# EAGLE board F (EAGLE 9.6.2)
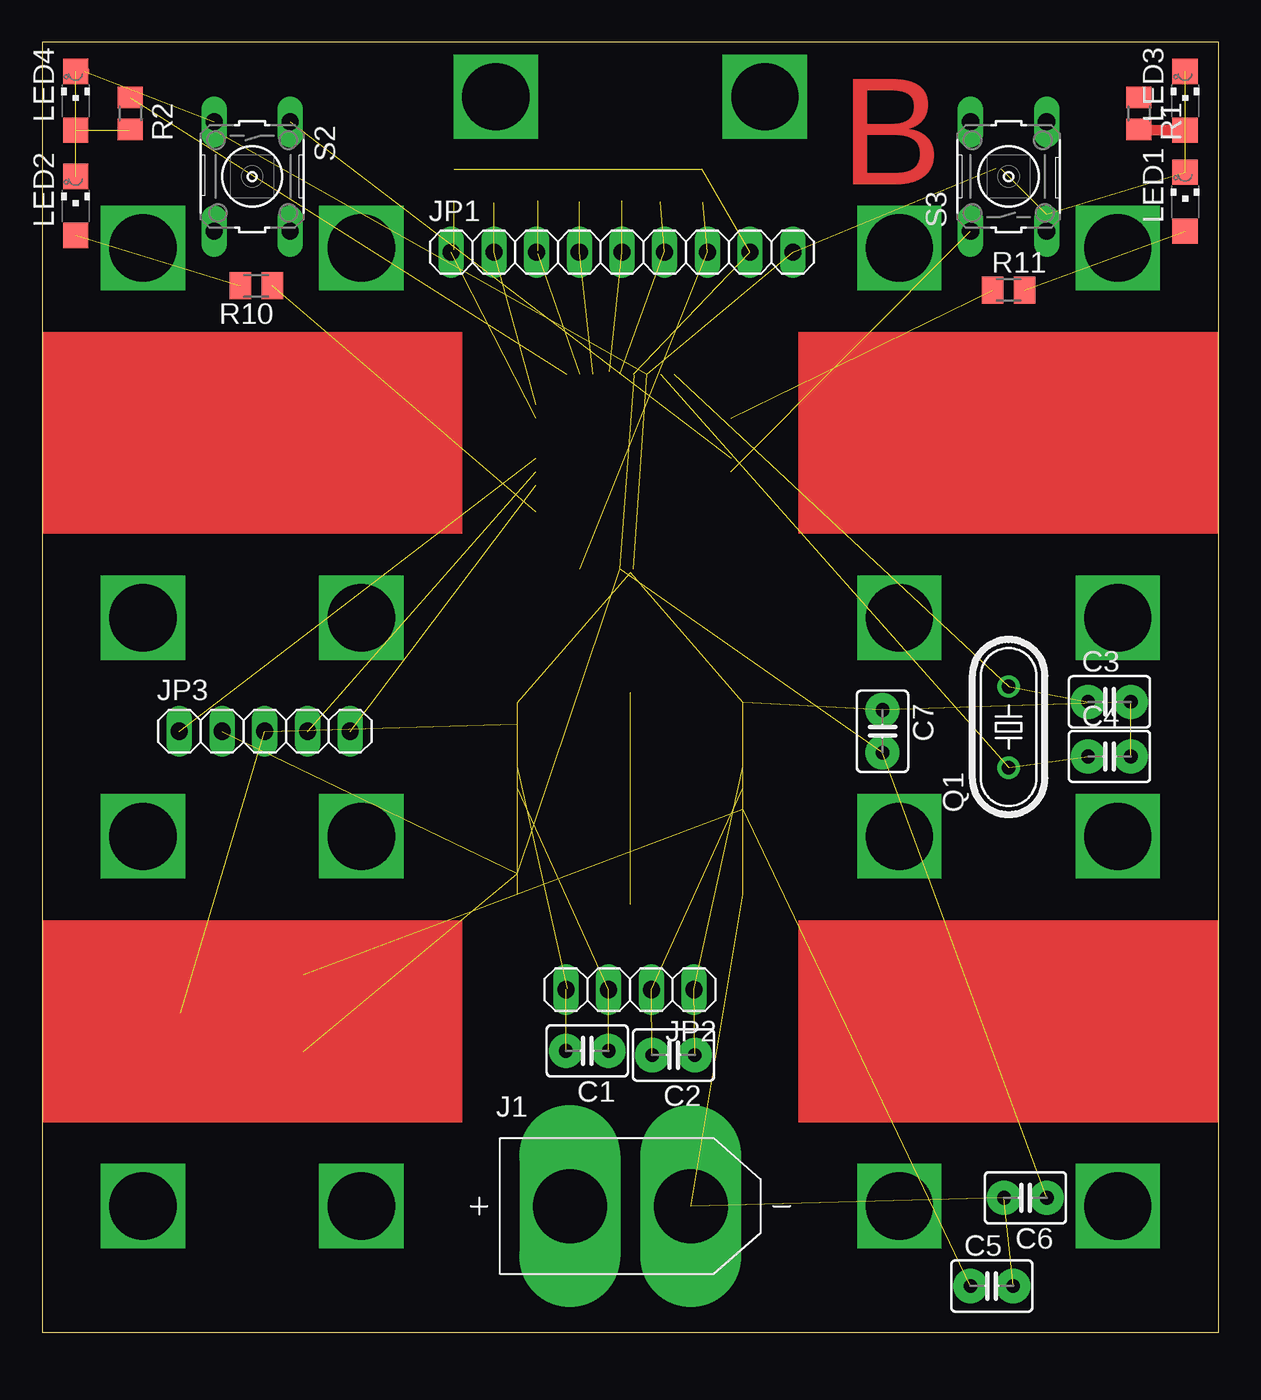
[diagram p0: board, top side]
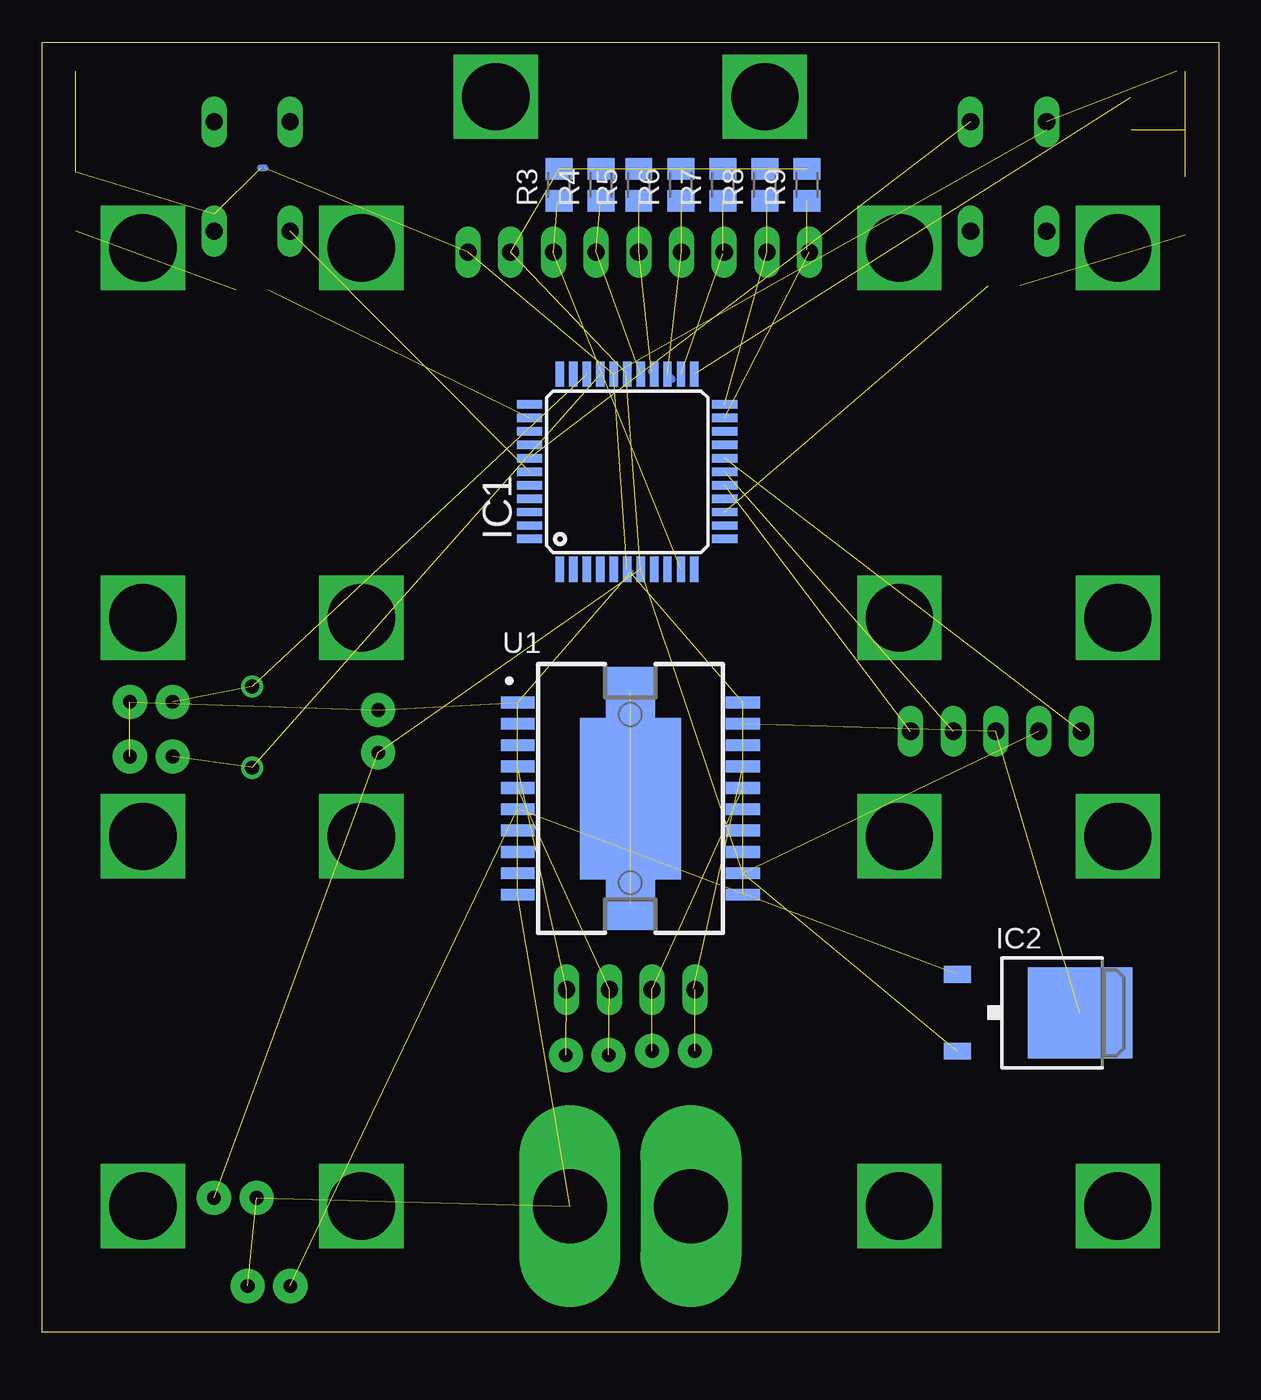
[diagram p1: board, bottom side, seen from below]

Size 70 x 76.75 mm. Coordinates in mm from the lower left corner, seen from the top.
Outline: 70,0 70,76.75 0,76.75 0,0 70,0
Copper layers (1*16): Top 0.035mm / dielectric 1.5mm / Bottom 0.035mm
Design rules "default *": minimum track width 10mil, minimum drill 24mil, track to track 8mil, track to pad 8mil, pad to pad 8mil, via to via 8mil, smd to smd 8mil, copper to edge 40mil, drill to drill 8mil, minimum pad ring 10mil, minimum via ring 0.4mm, stop-mask expansion 4mil, vias tented up to drill 0mil, thermal gap 10mil

## Footprints (pad centres in the part's own frame; a part is rotated, then mirrored left to right if it is on the bottom)
C2.5-3 = drill 0.813 pad 2.032: 1 -1.27,0; 2 1.27,0
TQFP44 = smd 1.5 x 0.5: 1 -5.8,4; 2 -5.8,3.2; 3 -5.8,2.4; 4 -5.8,1.6; 5 -5.8,0.8; 6 -5.8,0; 7 -5.8,-0.8; 8 -5.8,-1.6; 9 -5.8,-2.4; 10 -5.8,-3.2; 11 -5.8,-4; 23 5.8,-4; 24 5.8,-3.2; 25 5.8,-2.4; 26 5.8,-1.6; 27 5.8,-0.8; 28 5.8,0; 29 5.8,0.8; 30 5.8,1.6; 31 5.8,2.4; 32 5.8,3.2; 33 5.8,4 | smd 0.5 x 1.5: 12 -4,-5.8; 13 -3.2,-5.8; 14 -2.4,-5.8; 15 -1.6,-5.8; 16 -0.8,-5.8; 17 0,-5.8; 18 0.8,-5.8; 19 1.6,-5.8; 20 2.4,-5.8; 21 3.2,-5.8; 22 4,-5.8; 34 4,5.8; 35 3.2,5.8; 36 2.4,5.8; 37 1.6,5.8; 38 0.8,5.8; 39 0,5.8; 40 -0.8,5.8; 41 -1.6,5.8; 42 -2.4,5.8; 43 -3.2,5.8; 44 -4,5.8
TO252 = smd 1 x 1.6: 1 -2.28,-4.8; 2 2.28,-4.8 | smd 5.4 x 6.2: 3 0,2.5
AMASS_XT60-M = drill 4.401 pad 6 long: N 3.6,0 | drill 4.401 pad 5.994 long: P -3.6,0
1X09 = drill 1.016 long: 1 -10.16,0; 2 -7.62,0; 3 -5.08,0; 4 -2.54,0; 5 0,0; 6 2.54,0; 7 5.08,0; 8 7.62,0; 9 10.16,0
1X04 = drill 1.016 long: 1 -3.81,0; 2 -1.27,0; 3 1.27,0; 4 3.81,0
1X05 = drill 1.016 long: 1 -5.08,0; 2 -2.54,0; 3 0,0; 4 2.54,0; 5 5.08,0
CHIPLED_1206 = smd 1.5 x 1.5: A 0,-1.75; C 0,1.75
HC49/S = drill 0.813: 1 -2.413,0; 2 2.413,0
R0805 = smd 1.3 x 1.5: 1 -0.95,0; 2 0.95,0
M0805 = smd 1.3 x 1.6: 1 -0.95,0; 2 0.95,0
B3F-10XX = drill 1.016 long: 1 -3.251,2.261; 2 3.251,2.261; 3 -3.251,-2.261; 4 3.251,-2.261
SOIC127P1420X360-20N = smd 2 x 0.7: 1 -6.7,5.715; 2 -6.7,4.445; 3 -6.7,3.175; 4 -6.7,1.905; 5 -6.7,0.635; 6 -6.7,-0.635; 7 -6.7,-1.905; 8 -6.7,-3.175; 9 -6.7,-4.445; 10 -6.7,-5.715; 11 6.7,-5.715; 12 6.7,-4.445; 13 6.7,-3.175; 14 6.7,-1.905; 15 6.7,-0.635; 16 6.7,0.635; 17 6.7,1.905; 18 6.7,3.175; 19 6.7,4.445; 20 6.7,5.715 | smd 6 x 9.6: 21 0,0 | smd 2.9 x 3.05: 22 0,6.3; 23 0,-6.3

## Placement (x,y rotation side)
C1  [C2.5-3]  32.44,16.74 180 top
C2  [C2.5-3]  37.57,16.49 180 top
C3  [C2.5-3]  63.5,37.5 0 top
C4  [C2.5-3]  63.5,34.25 0 top
C5  [C2.5-3]  56.5,2.75 0 top
C6  [C2.5-3]  58.5,8 180 top
C7  [C2.5-3]  50,35.75 270 top
IC1  PIC18F4455_TQFP  [TQFP44]  35.19,51.19 90 bottom
IC2  7805DT  [TO252]  10.75,19 270 bottom
J1  XT60-M  [AMASS_XT60-M]  35,7.5 0 top
JP1  [1X09]  34.5,64.25 0 top
JP2  [1X04]  34.98,20.38 180 top
JP3  [1X05]  13.25,35.75 0 top
LED1  [CHIPLED_1206]  68,67.25 0 top
LED2  [CHIPLED_1206]  2,67 0 top
LED3  [CHIPLED_1206]  68,73.25 0 top
LED4  [CHIPLED_1206]  2,73.25 0 top
Q1  [HC49/S]  57.5,36 90 top
R1  [R0805]  65.25,72.5 270 top
R2  [R0805]  5.25,72.5 270 top
R3  [M0805]  39.25,68.25 90 bottom
R4  [M0805]  36.75,68.25 90 bottom
R5  [M0805]  34.5,68.25 90 bottom
R6  [M0805]  32,68.25 90 bottom
R7  [M0805]  29.5,68.25 90 bottom
R8  [M0805]  27,68.25 90 bottom
R9  [M0805]  24.5,68.25 90 bottom
R10  [M0805]  12.75,62.25 180 top
R11  [M0805]  57.5,62 0 top
S2  [B3F-10XX]  12.5,68.75 270 top
S3  [B3F-10XX]  57.5,68.75 90 top
U1  L298P  [SOIC127P1420X360-20N]  35,31.75 0 bottom

## Library data of the parts
C1-C7 = capacitor-wima
IC1 = microchip; MF: MICROCHIP; MPN: PIC18F4455-I/PT; OC_FARNELL: 9321322; OC_NEWARK: 08J9628
IC2 = linear
J1 = XT60-M; AVAILABILITY: Not in stock; CHECK_PRICES: https://www.snapeda.com/parts/XT60-M/AMASS/view-part/?ref=eda; DESCRIPTION: Plug; DC supply; XT60; male; PIN: 2; for cable; soldered; 30A; 500V; MF: AMASS; MP: XT60-M; PACKAGE: Package; PRICE: None; SNAPEDA_LINK: https://www.snapeda.com/parts/XT60-M/AMASS/view-part/?ref=snap
JP1-JP3 = pinhead
LED1-LED4 R10 R11 = adafruit
Q1 = crystal; OC_FARNELL: 1667008; OC_NEWARK: unknown
R1-R9 = resistor
S2 S3 = switch-omron; MPN: B3F-1000; OC_FARNELL: 176432; OC_NEWARK: 36M3542
U1 = L298P; AVAILABILITY: In Stock; CHECK_PRICES: https://www.snapeda.com/parts/L298P/STMicroelectronics/view-part/?ref=eda; DESCRIPTION: Half Bridge (4) Driver DC Motors, Relays, Solenoids, Stepper Motors Bipolar PowerSO-20; MF: STMicroelectronics; MP: L298P; PACKAGE: SO-20 STMicroelectronics; PRICE: None; PURCHASE-URL: https://www.snapeda.com/api/url_track_click_mouser/?unipart_id=41344&manufacturer=STMicroelectronics&part_name=L298P&search_term=None; SNAPEDA_LINK: https://www.snapeda.com/parts/L298P/STMicroelectronics/view-part/?ref=snap

## Nets
5V: C6.1 C7.2 IC1.7 IC1.28 IC2.2 JP1.8 JP3.2 R3.2 R4.2 R5.2 R6.2 R7.2 R8.2 R9.2 U1.12
B0: IC1.38 S2.1
B1: IC1.39 S3.1
GND: C3.2 C4.2 C5.2 C6.2 C7.1 IC1.6 IC1.29 IC2.3 J1.N JP1.9 JP3.3 LED1.C LED2.C LED3.C LED4.C S2.3 S3.3 U1.1 U1.2 U1.10 U1.11 U1.19 U1.20
I1: IC1.36
I2: IC1.8
I3: IC1.11
I4: IC1.9
IN1: U1.7
IN2: U1.9
IN3: U1.13
IN4: U1.15
LED_A: IC1.14 R10.1
LED_B: IC1.35 R11.1
LED_D: IC1.23 R2.1
MCRL: IC1.18 JP3.1
N$17: C4.1 IC1.30 Q1.1
N$18: C3.1 IC1.31 Q1.2
N$20: LED2.A R10.2
N$21: LED1.A R11.2
N$24: LED3.A R1.2
N$25: LED4.A R2.2
N$26: U1.21 U1.22 U1.23
N$27: U1.8
N$28: U1.14
OUT1: C2.1 JP2.1 U1.4
OUT2: C2.2 JP2.2 U1.5
OUT3: C1.1 JP2.3 U1.16
OUT4: C1.2 JP2.4 U1.17
PGC: IC1.16 JP3.5
PGD: IC1.17 JP3.4
S0: IC1.21 JP1.1 R9.1
S1: IC1.22 JP1.2 R8.1
S2: IC1.24 JP1.3 R7.1
S3: IC1.25 JP1.4 R6.1
S4: IC1.26 JP1.5 R5.1
S5: IC1.27 JP1.6 R4.1
S6: IC1.10 JP1.7 R3.1
SA: IC1.19
SB: IC1.20
VPOWER: C5.1 IC2.1 U1.6
VPREV: J1.P

## Tracks (layer width: path | path; a pad name or v marks a point on that pad's centre or on a via)
5V  (14 unrouted)
  Bottom 0.406: 35.25,56.93 IC1.28
B0  (1 unrouted)
  Bottom 0.406: S2.1
B1  (1 unrouted)
GND  (23 unrouted)
  Top 0.61: LED4.C 2.5,75
  Bottom 0.406: 56.75,69.25 57,69.25 | 59.75,66.5 S3.3 | S2.3 10.24,71.51 | IC1.6 35,45.2
  Bottom 0.61: 10.25,72.01 S2.3
LED_A  (1 unrouted)
  Bottom 0.406: 29.35,48.75 IC1.14
LED_B  (1 unrouted)
LED_D  (1 unrouted)
MCRL  (1 unrouted)
N$1  (via drill 4)
  other vias: 19,64.5
N$2  (via drill 4)
  other vias: 6,64.5
N$3  (via drill 4)
  other vias: 6,29.5
N$4  (via drill 4)
  other vias: 6,7.5
N$5  (via drill 4)
  other vias: 19,42.5
N$6  (via drill 4)
  other vias: 6,42.5
N$7  (via drill 4)
  other vias: 19,7.5
N$8  (via drill 4)
  other vias: 19,29.5
N$9  (via drill 4)
  other vias: 51,64.5
N$10  (via drill 4)
  other vias: 64,64.5
N$11  (via drill 4)
  other vias: 51,42.5
N$12  (via drill 4)
  other vias: 64,42.5
N$13  (via drill 4)
  other vias: 51,29.5
N$14  (via drill 4)
  other vias: 51,7.5
N$15  (via drill 4)
  other vias: 64,7.5
N$16  (via drill 4)
  other vias: 64,29.5
N$17  (2 unrouted)
N$18  (2 unrouted)
N$20  (1 unrouted)
N$21  (1 unrouted)
N$22  (via drill 4)
  other vias: 27,73.5
N$23  (via drill 4)
  other vias: 43,73.5
N$24
  Top 0.61: LED3.A 65.3,71.5 R1.2
N$25  (1 unrouted)
  Top 0.61: 5.2,71.5 R2.2
N$26  (2 unrouted)
OUT1  (2 unrouted)
OUT2  (2 unrouted)
OUT3  (2 unrouted)
OUT4  (2 unrouted)
  Bottom 0.406: 31.25,20.46 JP2.4
PGC  (1 unrouted)
PGD  (1 unrouted)
S0  (2 unrouted)
  Bottom 0.406: 24.5,64.41 JP1.1
S1  (2 unrouted)
  Bottom 0.406: 26.88,67.18 R8.1
S2  (2 unrouted)
  Bottom 0.406: 29.5,64.17 JP1.3 29.5,64.33
S3  (2 unrouted)
  Bottom 0.406: IC1.25 32.5,56.7 | 31.96,67.26 R6.1
S4  (2 unrouted)
  Bottom 0.406: 33.75,57.15 IC1.26
S5  (2 unrouted)
  Bottom 0.406: 37,64.21 JP1.6 | 36.79,67.26 R4.1
S6  (2 unrouted)
  Bottom 0.406: 39.33,67.22 R3.1 | 39.59,64.24 JP1.7
VPOWER  (2 unrouted)
(copper drawn outside any net)
  shapes: Top area x4

## Text on the board
Top: B